# Altium PCB PCB.PcbDoc
Units mil, origin at the board's own origin, x right, y up, seen from the top; angles counter-clockwise.
Board outline 3937.01 x 2598.43 mil, 2 copper layers (Top Layer, Bottom Layer); 72 components, 55 nets, 239 pads, 52 vias.
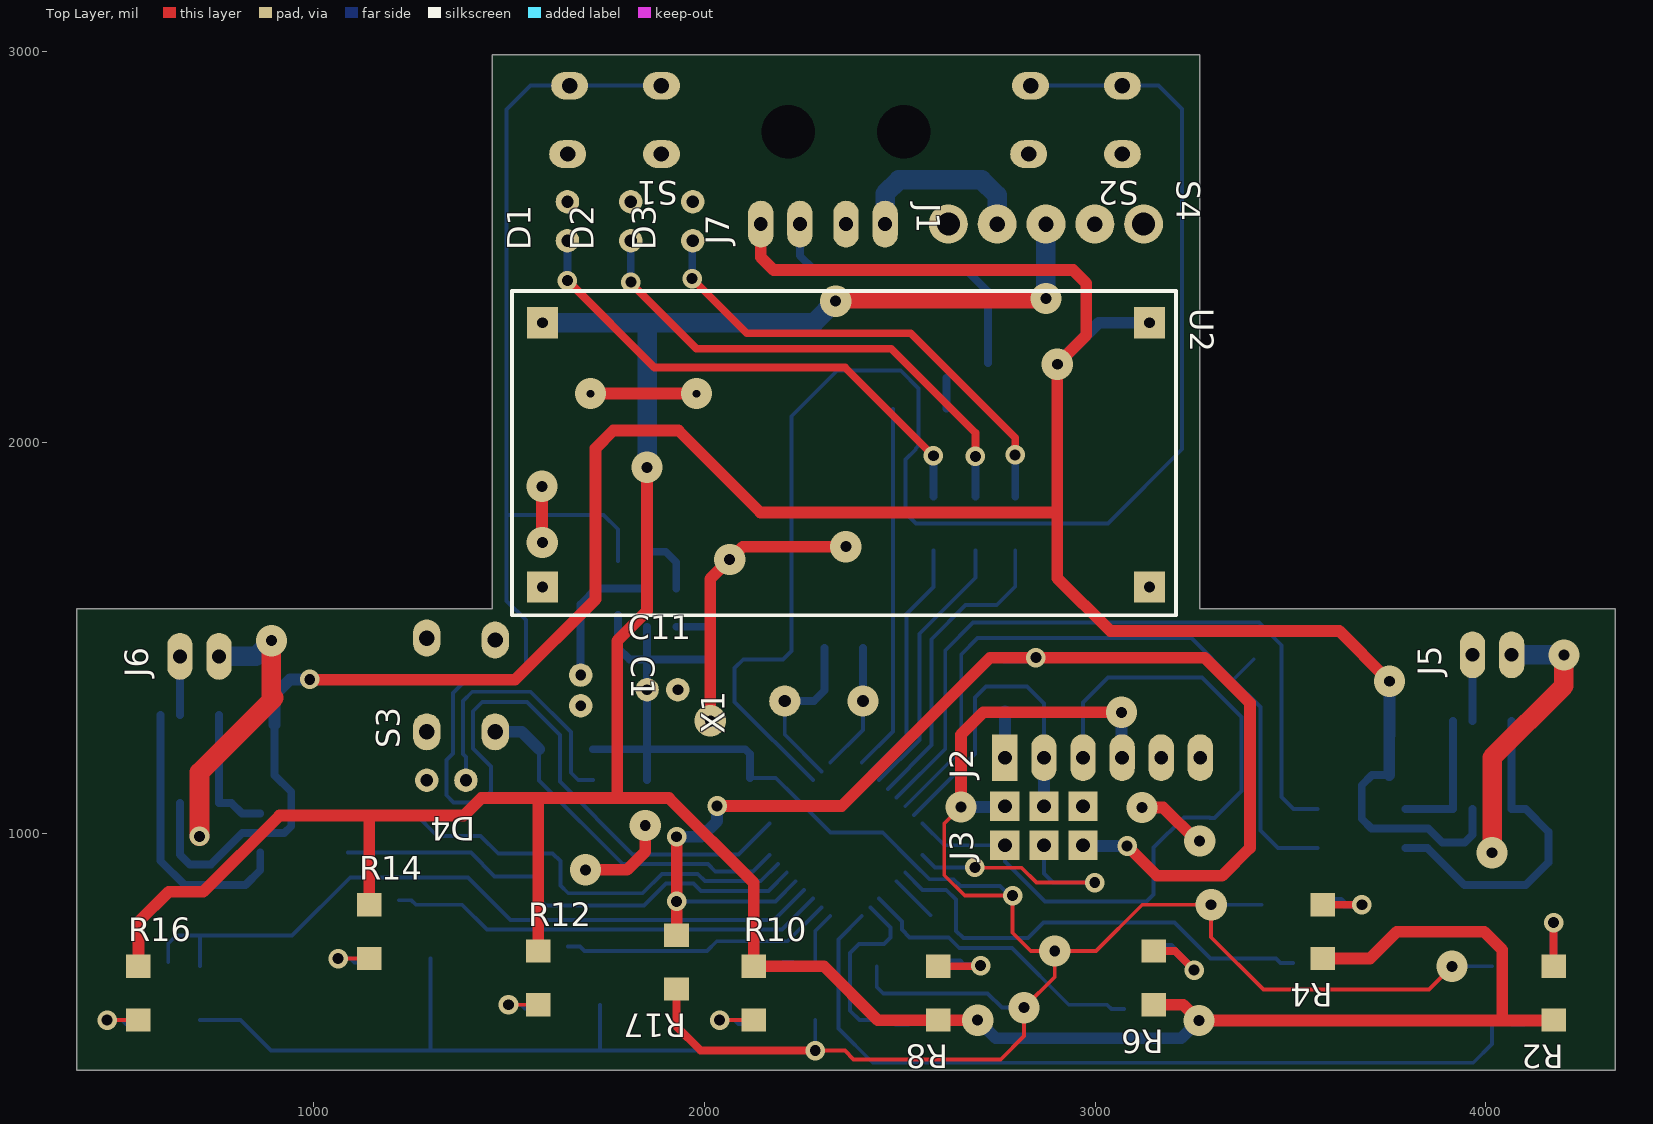
[diagram p0: Top Layer view]
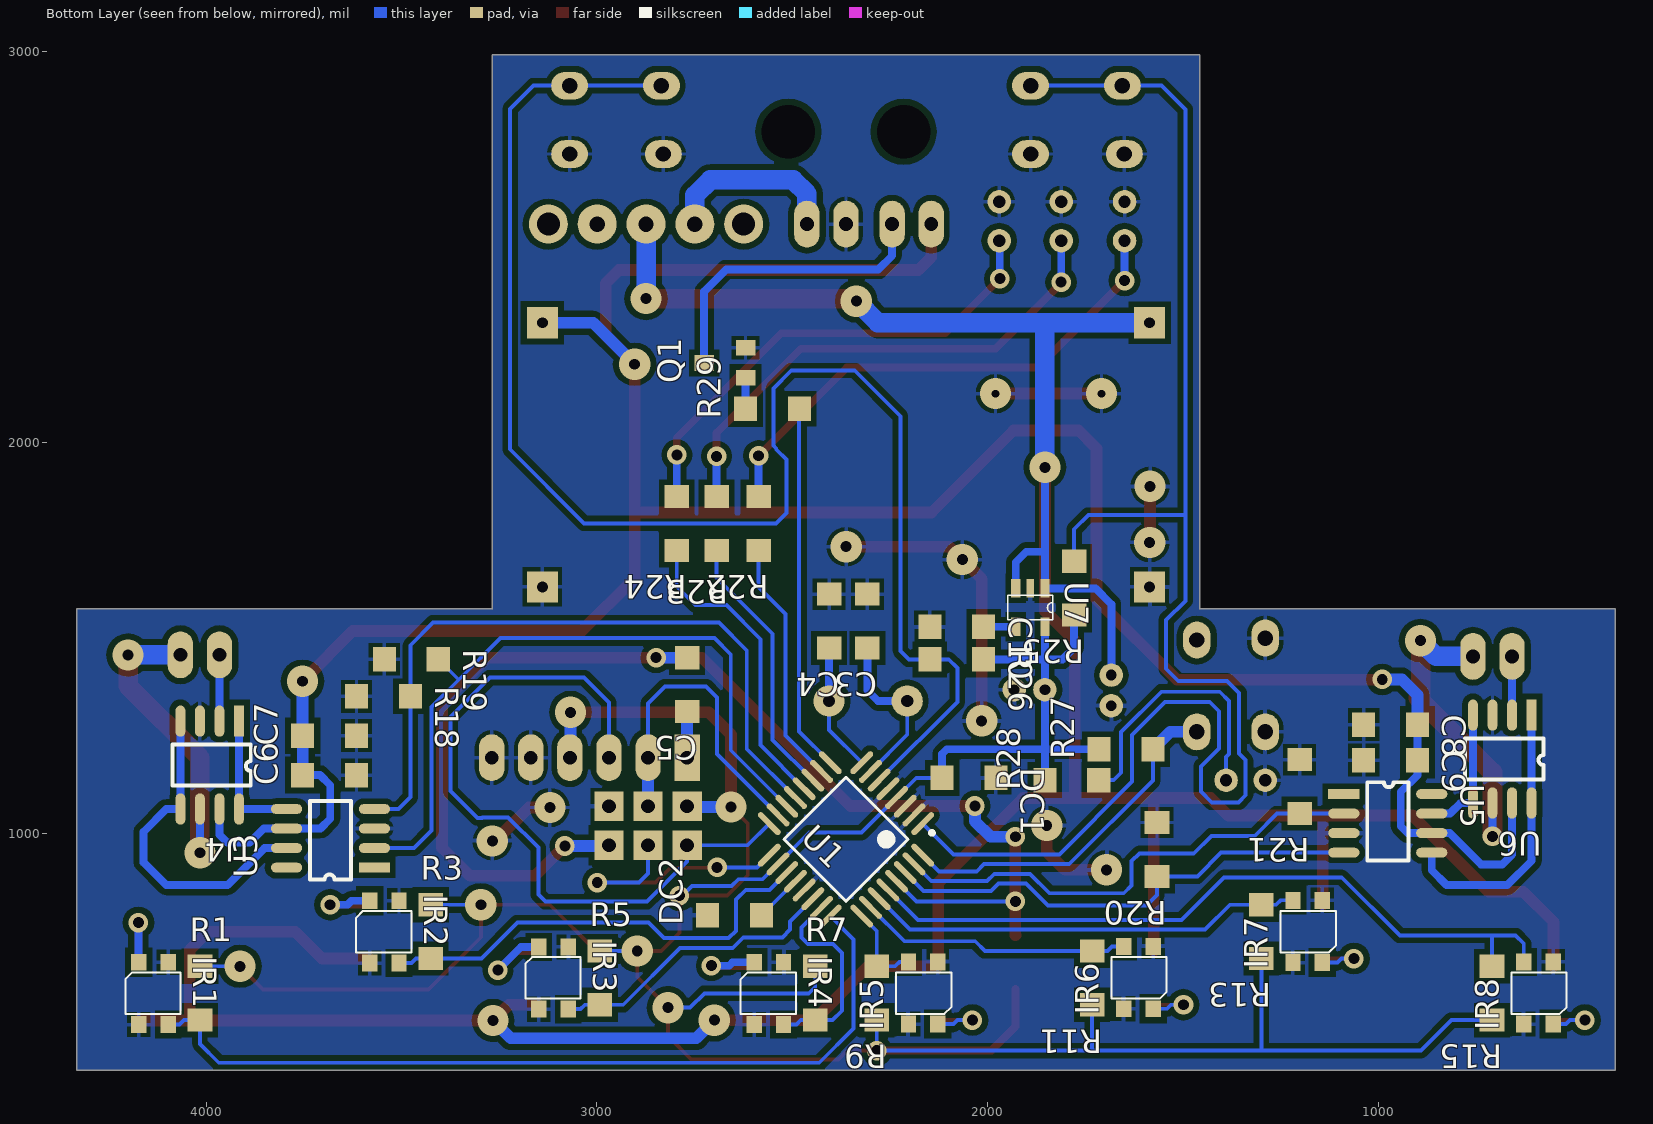
[diagram p1: Bottom Layer view, seen from below]

## Layer stack, top to bottom
Top Solder: solder mask 0.4, Solder Resist, Dk 3.5
Top Layer: signal copper 1.4
Dielectric 1: dielectric 12.6, FR-4, Dk 4.8
Bottom Layer: signal copper 1.4
Bottom Solder: solder mask 0.4, Solder Resist, Dk 3.5

## Board outline
393.7,393.7 393.7,1574.8 1456.69,1574.8 1456.69,2992.13 3267.72,2992.13 3267.72,1574.8 4330.71,1574.8 4330.71,393.7

## Design rules (kind name [scope] priority, off if disabled: settings)
Clearance [All] p1: gap=15
HoleSize [All] p1: absolutevalues=TRUE maxlimit=13779.53 minlimit=0.98 maxpercent=80.000 minpercent=20.000
PolygonConnect [All] p1: connectstyle=Relief reliefconductorwidth=10 reliefentries=4 polygonreliefangle="90 Angle" airgapwidth=10
RoutingVias [All] p1: holewidth=28 width=50 viastyle="Through Hole" minholewidth=28 minwidth=50 maxholewidth=28 maxwidth=80
SolderMaskExpansion [All] p1: expansion=4
Width [All] p1: maxlimit=50 minlimit=10 preferedwidth=20
29 further rules are at their usual default settings.

## Components (designator, comment, footprint, x,y, rotation, side; value= is the part's Value field where it differs from the comment)
C1 "CAP-ELEC" CAP-ELEC-5x11x2mm 1683.07,1365.35 r270 top
C3 "CAP-CER" C1206 2307.48,1542.91 r270 bottom
C4 "CAP-CER" C1206 2405.51,1542.91 r270 bottom
C5 "CAP-CER" C1206 2768.9,1380.32 r270 bottom
C6 "CAP-CER" C1206 3683.86,1148.82 r0 bottom
C7 "CAP-CER" C1206 3683.86,1249.62 r0 bottom
C8 "CAP-CER" C1206 968.5,1277.94 r180 bottom
C9 "CAP-CER" C1206 968.5,1187.01 r180 bottom
C10 "CAP-CER" C1206 2078.74,1528.35 r180 bottom
C11 "CAP-ELEC" CAP-ELEC-5x11x2mm 1892.52,1367.32 r0 top
D1 "LED" LED-3MM-YELLOW 1649.21,2566.54 r90 top
D2 "LED" LED-3MM-YELLOW 1811.42,2566.54 r90 top
D3 "LED" LED-3MM-YELLOW 1970.08,2566.54 r90 top
D4 "LED" LED-3MM-RED 1339.37,1135.43 r180 top
DC1 "CAP-CER" C1206 2047.24,1141.73 r180 bottom
DC2 "CAP-CER" C1206 2647.64,790.16 r0 bottom
IR1 "QRE1113GR" QRE1113GR 4133.86,590.55 r270 bottom
IR2 "QRE1113GR" QRE1113GR 3543.31,748.03 r270 bottom
IR3 "QRE1113GR" QRE1113GR 3110.24,629.92 r270 bottom
IR4 "QRE1113GR" QRE1113GR 2559.06,590.55 r270 bottom
IR5 "QRE1113GR" QRE1113GR 2165.35,590.55 r90 bottom
IR6 "QRE1113GR" QRE1113GR 1614.17,629.92 r90 bottom
IR7 "QRE1113GR" QRE1113GR 1181.1,748.03 r90 bottom
IR8 "QRE1113GR" QRE1113GR 590.55,590.55 r90 bottom
J1 "BAT" "HEADER 1x2" 2412.2,2559.06 r270 top
J2 "UART" "Header 1x6" 2768.9,1193.31 r90 top
J3 "ISP" "HEADER 2x3" 2768.9,969.16 r90 top
J5 "MOT IZQ" "HEADER 1x2" 4015.75,1456.69 r90 top
J6 "MOT DER" "HEADER 1x2" 707.48,1452.76 r90 top
J7 "EDF" "HEADER 1x2" 2194.09,2559.06 r90 top
Q1 "MMBT2222A" SOT-23 2745.3,1928.64 r90 bottom
R1 "RES" R1206 4015.75,590.55 r90 bottom
R2 "RES" R1206 4173.23,590.55 r270 top
R3 "RES" R1206 3425.2,748.03 r90 bottom
R4 "RES" R1206 3582.68,748.03 r270 top
R5 "RES" R1206 2992.13,629.92 r90 bottom
R6 "RES" R1206 3149.61,629.92 r270 top
R7 "RES" R1206 2440.94,590.55 r90 bottom
R8 "RES" R1206 2598.43,590.55 r270 top
R9 "RES" R1206 2283.46,590.55 r270 bottom
R10 "RES" R1206 2125.98,590.55 r90 top
R11 "RES" R1206 1732.28,629.92 r270 bottom
R12 "RES" R1206 1574.8,629.92 r90 top
R13 "RES" R1206 1299.21,748.03 r270 bottom
R14 "RES" R1206 1141.73,748.03 r90 top
R15 "RES" R1206 708.66,590.55 r270 bottom
R16 "RES" R1206 551.18,590.55 r90 top
R17 "RES" R1206 1928.35,670.08 r270 top
R18 "RES" R1206 3546.06,1350.39 r180 bottom
R19 "RES" R1206 3474.8,1445.28 r180 bottom
R20 "RES" R1206 1566.14,958.66 r270 bottom
R21 "RES" R1206 1201.18,1119.29 r270 bottom
R22 "RES" R1206 2585.83,1792.91 r270 bottom
R23 "RES" R1206 2693.31,1792.91 r270 bottom
R24 "RES" R1206 2795.29,1792.91 r270 bottom
R25 "RES" R1206 1778.35,1627.17 r270 bottom
R26 "RES" R1206 2078.74,1444.88 r180 bottom
R27 "RES" R1206 1645.67,1214.96 r0 bottom
R28 "RES" R1206 1784.25,1135.97 r0 bottom
R29 "RES" R1206 2550.41,2086.32 r0 bottom
S1 "BUTTON" TACT_SWITCH-SMALL-4PIN 1889.76,2913.39 r180 top
S2 "BUTTON" TACT_SWITCH-SMALL-4PIN 3069.65,2913.39 r180 top
S3 "BUTTON" TACT_SWITCH-SMALL-4PIN 1464.17,1259.45 r90 top
S4 "SLIDE-SWITCH" SWITCH 2874.02,2559.06 r0 top
U1 "ATmega328PB-AUR" 32A_M 2362.2,984.25 r315 bottom
U2 "XL6009 Module" "XL6009 MDL" 2362.2,1968.5 r0 top
U3 "4427" SOIC-8 3354.09,912.01 r0 bottom
U4 "ZXMHC3F381N8" SOIC-8 3915.75,1502.01 r270 bottom
U5 "4427" SOIC-8 1302.99,1100.39 r180 bottom
U6 "ZXMHC3F381N8" SOIC-8 607.48,1517.36 r270 bottom
U7 "LP2985" SOT-23-5 1890.55,1577.56 r270 bottom
X1 "XTAL" HC-49/S 2305.51,1338.19 r180 top

## Footprints (in the part's own frame and the unit in brackets; to place one, negate y for a bottom-side part, rotate by r counter-clockwise, add the part's x,y. Pads: shape width x height; smd on the part's side, far side on the other; paste and mask are expansions set on the pad)
32A_M [mm] "Thin QFP, 32-Leads, Body 7x7mm, Pitch 0.8mm, IPC Low Density"
  oval 1.95x0.381 smd: 1(-4.25,2.8) 2(-4.25,2) 3(-4.25,1.2) 4(-4.25,0.4) 5(-4.25,-0.4) 6(-4.25,-1.2) 7(-4.25,-2) 8(-4.25,-2.8) 17(4.25,-2.8) 18(4.25,-2) 19(4.25,-1.2) 20(4.25,-0.4) 21(4.25,0.4) 22(4.25,1.2) 23(4.25,2) 24(4.25,2.8)
  oval 0.381x1.95 smd: 9(-2.8,-4.25) 10(-2,-4.25) 11(-1.2,-4.25) 12(-0.4,-4.25) 13(0.4,-4.25) 14(1.2,-4.25) 15(2,-4.25) 16(2.8,-4.25) 25(2.8,4.25) 26(2,4.25) 27(1.2,4.25) 28(0.4,4.25) 29(-0.4,4.25) 30(-1.2,4.25) 31(-2,4.25) 32(-2.8,4.25)
  silkscreen extent -4.37,-2.85 2.85,3.77, body extent -3.5,-3.5 3.5,3.5, height 1.2
C1206 [mm]
  rect 1.5x1.6 smd: 1(-1.75,0) 2(1.75,0)
  body extent -1.6,-0.76 1.6,0.84, height 1.26
CAP-ELEC-5x11x2mm [mil]
  round 60 hole 27.56: 1(-39.37,0) 2(39.37,0)
  body extent -100,-99 99,99, height 454
HC-49/S [mil]
  round 80 hole 31.5: 1(-100,0) 2(100,0)
  body extent -223,-90 223,93, height 138
"HEADER 1x2" [mil]
  oval 120x65 hole 35.43: 1(0,50) 2(0,-50)
  body extent -49,-100 49,100, height 336
"Header 1x6" [mil]
  rect 120x65 hole 35.43: 1(0,0)
  oval 120x65 hole 35.43: 2(0,-100) 3(0,-200) 4(0,-300) 5(0,-400) 6(0,-500)
  body extent -49,-550 49,50, height 336
"HEADER 2x3" [mm]
  rect 1.905x1.905 hole 0.9: 1(0,0) 2(2.54,0) 3(0,-2.54) 4(2.54,-2.54) 5(0,-5.08) 6(2.54,-5.08)
  body extent -1.24,-6.35 3.78,1.27, height 8.54
LED-3MM-RED [mil]
  round 60 hole 31.5: A(-50,0) K(50,0)
  body extent -66,-65 64,65, height 217
LED-3MM-YELLOW [mil]
  round 60 hole 31.5: A(-50,0) K(50,0)
  body extent -66,-65 64,65, height 217
QRE1113GR [mm]
  rect 1.1x1 smd: A(-2.01,-0.97) C(2.04,0.94) E(-2.01,0.94) K(2.04,-0.97)
  silkscreen extent -1.35,-1.85 1.35,1.75, body extent -2.4,-1.8 2.4,1.8, height 1.83
R1206 [mm]
  rect 1.5x1.6 smd: 1(-1.75,0) 2(1.75,0)
  body extent -1.6,-0.76 1.6,0.84, height 0.68
SOIC-8 [mil]
  rect 80x25 smd: 1(215,0)
  oval 80x25 smd: 2(215,-50) 3(215,-100) 4(215,-150) 5(440,-150) 6(440,-100) 7(440,-50) 8(440,0)
  silkscreen extent 275,-170 380,30, body extent 212,-171 448,21, height 69
SOT-23 [mil]
  rect 40x50 smd: B(237.2,-125.98) C(275,-20) E(313.98,-125.98)
  body extent 218,-124 333,-27, height 38
SOT-23-5 [mm]
  rect 1.2x0.6 smd: 1(-1.25,0.95) 3(-1.25,-0.95) 4(1.25,-0.95) 5(1.25,0.95)
  rect 1.2x0.5 smd: 2(-1.25,0)
  silkscreen extent -0.8,-1.45 0.8,1.45, body extent -1.4,-1.45 1.4,1.45, height 1.45
SWITCH [mm]
  round 2.54 hole 1: 1(-3.175,0) 2(0,0) 3(3.175,0)
  round 2.54 hole 1.5: 4(-6.35,0) 4(6.35,0)
  body extent -7,-3.1 7,3.1, height 9.65
TACT_SWITCH-SMALL-4PIN [mm]
  oval 2.4x1.8 hole 1: 1(0,4.445) 1(6.096,4.445) 2(0,0) 2(5.969,0)
  body extent -0.94,-0.79 7.04,5.21, height 5.15
"XL6009 MDL" [mil]
  rect 80x80 hole 27.56: 0(-777,338) 1(-777,-338) 2(777,-338) 3(777,338)
  silkscreen extent -855,-411 845,419, body extent -850,-415 850,415, height 502

## Part data
J1 J5 J6 J7: library part "Header 1x2"
J2: library part "Header 1x6"
J3: library part "Header 2x3"
Q1: library part NPN
U1: "8-bit AVR Microcontroller, 32KB Flash, 1KB EEPROM, 2KB SRAM, 32-pin TQFP, Industrial Grade (-40°C to 85°C), Reel"

## Free pads (board coordinates)
  round 0 hole 137.8 unplated: 2(2214.57,2795.28) 3(2509.84,2795.28)

## Via types
v1: diameter 50, hole 28, Top Layer to Bottom Layer, 25 vias
v2: diameter 80, hole 28, Top Layer to Bottom Layer, 25 vias
v3: diameter 80, hole 19.68, Top Layer to Bottom Layer, 2 vias

## Nets (pads, with @x,y where several pads share a name; then routed paths per layer and width w, separated by ;. In a path a pad name is that pad's centre, name@x,y a point inside that pad or via, vN(x,y) a via of type N, cw(c..) or ccw(c..) an arc to the next point about the centre after c; other vN are vias at no path point)
BAT: C1.1 R2.2 R4.2 R6.2 R8.2 R10.2 R12.2 R14.2 R16.2 S4.2 U2.0 U7.1 U7.3 | length 9289.7
  Top Layer w30: R16.2 551.18,772.83 628.74,850.39 717.32,850.39 912.2,1045.28 1141.73,1045.28 ; R14.2 1141.73,1045.28 ; R12.2 1574.8,1090.08 ; v2(1853.15,1936.61) 1853.15,1568.9 1776.38,1492.13 1776.38,1090.08 ; v2(2699.21,521.65) R8.2 2443.7,521.65 2305.91,659.45 R10.2 2125.98,873.23 1909.14,1090.08 1776.38,1090.08 ; R6.2 3225.59,561.02 v2(3265.75,520.87) 4042.13,520.87 ; R4.2 3703.15,679.13 3771.65,747.64 3996.06,747.64 4042.13,701.57 4042.13,520.87 ; R2.2@4173.23,520.87 4042.13,520.87 ; 1141.73,1045.28 1384.07,1045.28 1428.87,1090.08 1574.8,1090.08 ; 1574.8,1090.08 1776.38,1090.08
  Top Layer w50: v2(2335.83,2361.81) 2342.52,2368.5 v2(2874.02,2368.5)
  Bottom Layer w20: C1.1 1683.07,1586.22 1723.62,1626.77 U7.1 1853.15,1720.47 ; v2(1853.15,1936.61) 1853.15,1720.47 ; U7.3 1927.95,1693.31 1900.79,1720.47 1853.15,1720.47
  Bottom Layer w30: v2(2699.21,521.65) 2745.67,475.2 3220.08,475.2 v2(3265.75,520.87)
  Bottom Layer w50: U2.0 1853.15,2306.5 ; v2(1853.15,1936.61) 1853.15,2306.5 ; v2(2335.83,2361.81) 2280.52,2306.5 1853.15,2306.5 ; v2(2874.02,2368.5) S4.2
BTN1: R25.1 S1.2 U1.1 | length 4125.6
  Bottom Layer w10: R25.1 1778.35,1777.95 1741.73,1814.57 1493.7,1814.57 ; S1.2@1889.76,2913.39 1654.76,2913.39 1554.72,2913.39 1493.7,2852.36 1493.7,1814.57 ; U1.1 2087.27,945.94 1816.08,945.94 1629.92,1132.1 1629.92,1251.18 1545.67,1335.43 1431.1,1335.43 1407.87,1312.2 1407.87,1216.93 1453.54,1171.26 1453.54,1106.3 1425.98,1078.74 1357.87,1078.74 1339.37,1097.24 1339.37,1187.01 1355.91,1203.54 1355.91,1359.06 1386.61,1389.76 1511.81,1389.76 1542.91,1420.87 1542.91,1545.67 1493.7,1594.88 1493.7,1814.57
BTN2: R26.1 S2.2 U1.6 | length 3939.3
  Bottom Layer w10: U1.6 2077.17,1336.1 2077.17,1422.83 2099.21,1444.88 R26.1 2201.18,1444.88 2222.83,1466.54 2222.83,2067.32 2339.76,2184.25 2502.36,2184.25 2548.03,2138.58 2548.03,1991.99 2540.83,1984.78 2540.83,1982.17 2514.96,1956.3 2514.96,1819.69 2541.73,1792.91 3032.28,1792.91 3222.05,1982.68 3222.05,2853.54 3162.2,2913.39 3069.65,2913.39 S2.2@2834.65,2913.39
BTN3: R27.1 S3.2 U1.32 | length 913.7
  Bottom Layer w10: R27.1 1576.77,1135.04 1790.87,920.94 2008.98,920.94 2027.56,902.36 2124.42,902.36 U1.32
  Bottom Layer w30: S3.2@1464.17,1259.45 1532.28,1259.45 R27.1
EDF: R29.1 U1.9 | length 938.8
  Bottom Layer w10: U1.9 2482.28,1260.23 R29.1@2482.28,2086.32
GND: C1.2 C3.1 C4.1 C6.1 C7.1 C8.1 C9.1 C10.1 C11.2 D1.K D2.K D3.K D4.K DC1.2 DC2.2 IR1.E IR1.K IR2.E IR2.K IR3.E IR3.K IR4.E IR4.K IR5.E IR5.K IR6.E IR6.K IR7.E IR7.K IR8.E IR8.K J1.2 J2.5 J2.6 J3.6 Q1.E R18.1 R19.1 R20.1 R21.1 S1.1 S2.1 S3.1 U1.2 U1.3 U1.5 U1.21 U2.1 U2.2 U3.3 U4.3 U5.3 U6.3 U7.2 | length 1581.9
  Top Layer w30: v2(1583.86,1887.8) 1583.86,1745.28 v2(1585.04,1744.09) ; v2(1695.28,906.3) 1801.97,906.3 1848.42,952.75 v2(1848.42,1020.08) ; v3(1708.27,2125.2) v3(1979.53,2125.2) ; v2(2014.96,1287.8) 2014.96,1650.79 v2(2064.57,1700.39) 2097.64,1733.46 v2(2361.81,1733.46) ; v2(3120.08,1065.75) 3174.41,1065.75 3259.84,980.32 v2(3267.32,980.32)
IR1: IR1.C R1.1 U1.24 | length 2188.3
  Bottom Layer w10: U1.24 2342.91,728.33 2342.91,500.39 2430.71,412.6 3967.72,412.6 4015.75,460.63 R1.1 4056.69,521.65 4068.11,510.24 IR1.C
IR2: IR2.C R3.1 U1.19 | length 1168.1
  Bottom Layer w10: U1.19 2558.15,855.12 2618.9,855.12 2644.09,829.92 2644.09,749.92 2662.52,731.5 2828.35,731.5 2868.11,771.26 3203.15,771.26 3295.28,679.13 R3.1 3462.99,679.13 3474.41,667.72 IR2.C
IR3: IR3.C R5.1 U1.22 | length 755.6
  Bottom Layer w10: U1.22 2505.12,774.53 2505.12,753.54 2525.2,733.46 2625.2,733.46 2652.17,706.5 2786.81,706.5 2932.28,561.02 R5.1 3030.31,561.02 3041.73,549.61 IR3.C
IR4: IR4.C R7.1 U1.23 | length 530.8
  Bottom Layer w10: U1.23 2475.98,759.12 2475.98,732.68 2459.84,716.54 2395.28,716.54 2372.44,693.7 2372.44,545.67 2396.46,521.65 R7.1 2477.95,521.65 2489.37,510.24 IR4.C
IR5: IR5.C R9.1 U1.25 | length 230.3
  Bottom Layer w10: IR5.C 2225.2,670.87 2236.61,659.45 R9.1 2283.46,749.61 U1.25
IR6: IR6.C R11.1 U1.26 | length 699.3
  Bottom Layer w10: IR6.C 1681.1,710.24 1692.52,698.82 R11.1 2006.69,698.82 2031.5,723.62 2212.93,723.62 U1.26
IR7: IR7.C R13.1 U1.27 | length 1123.2
  Bottom Layer w10: IR7.C 1250,828.35 1261.42,816.93 R13.1 1379.13,816.93 1442.91,753.15 2197.92,753.15 U1.27
IR8: IR8.C R15.1 U1.28 | length 1899.8
  Bottom Layer w10: IR8.C 627.56,717.32 648.43,738.19 708.66,738.19 ; R15.1 708.66,738.19 ; U1.28 2178.37,778.15 1503.74,778.15 1394.88,887.01 1093.31,887.01 944.49,738.19 708.66,738.19
LED1: R22.2 U1.10 | length 632.5
  Bottom Layer w10: U1.10 2516.54,1249.94 2516.54,1560.63 2585.83,1629.92 R22.2
LED2: R23.2 U1.11 | length 690
  Bottom Layer w10: U1.11 2550,1238.86 2550,1510.63 2693.31,1653.94 R23.2
LED3: R24.2 U1.12 | length 791.9
  Bottom Layer w10: U1.12 2581.1,1225.42 2581.1,1496.46 2668.5,1583.86 2748.03,1583.86 2795.29,1631.11 R24.2
MD_DIR: R20.2 U1.30 U5.4 | length 1257.4
  Bottom Layer w10: U5.4 1402.36,950.39 1462.99,889.76 R20.2 1566.14,841.73 1593.31,814.57 1844.88,814.57 1901.26,870.94 1972.36,870.94 1990.94,852.36 2163.5,852.36 U1.30
MD_PWM: R21.2 U1.31 U5.2 | length 1267.8
  Bottom Layer w10: U5.2 R21.2 1259.06,1050.39 1316.14,993.31 1427.17,993.31 1472.05,948.43 1611.42,948.43 1631.1,928.74 1631.1,866.54 1651.34,846.3 1841.26,846.3 1890.9,895.94 1982.72,895.94 2001.3,877.36 2143.96,877.36 U1.31
MI_DIR: R18.2 U1.13 U3.4 | length 1836.1
  Bottom Layer w10: U1.13 2616.14,1215.92 2616.14,1468.11 2687.4,1539.37 3418.9,1539.37 3477.17,1481.1 R18.2 3477.17,1092.52 3507.68,1062.01 U3.4
MI_PWM: R19.2 U1.14 U3.2 | length 1859
  Bottom Layer w10: U1.14 2657.09,1212.32 2657.09,1457.48 2698.82,1499.21 3246.85,1499.21 3353.35,1392.72 ; R19.2 3353.35,1392.72 ; U3.2 3467.91,962.01 3423.23,1006.69 3423.23,1322.83 3353.35,1392.72
NetC5_2: C5.2 J2.1 | length 118.1
  Bottom Layer w30: J2.1 C5.2
NetC10_2: C10.2 U7.4 | length 81.9
  Bottom Layer w20: U7.4 C10.2
NetD1_A: D1.A R22.1 | length 1347.2
  Top Layer w20: v1(1649.22,2414.56) 1872.05,2191.73 2360.24,2191.73 v1(2585.83,1966.14)
  Bottom Layer w20: v1(1649.22,2414.56) D1.A D1.A@1649.22,2535.04 ; R22.1 v1(2585.83,1966.14)
NetD2_A: D2.A R23.1 | length 1330.9
  Top Layer w20: v1@1809.45,2410.24 1979.53,2240.16 2477.95,2240.16 2693.31,2024.8 v1(2693.31,1964.57)
  Bottom Layer w20: v1(1811.42,2410.63) D2.A D2.A@1811.42,2535.04 ; R23.1 v1(2693.31,1964.57)
NetD3_A: D3.A R24.1 | length 1262
  Top Layer w20: v1(1968.5,2419.29) 2108.27,2279.53 2527.56,2279.53 2795.29,2011.8 v1(2795.29,1968.12)
  Bottom Layer w20: v1(1968.5,2419.29) 1968.5,2514.95 D3.A D3.A@1970.08,2535.04 ; R24.1 v1(2795.29,1968.12)
NetD4_A: D4.A R28.1 | length 704.6
  Bottom Layer w10: D4.A 1389.37,1194.88 1381.5,1202.76 1381.5,1338.19 1405.51,1362.2 1555.12,1362.2 1658.27,1259.06 1658.27,1154.72 1677.02,1135.97 R28.1
NetDC2_1: DC2.1 U1.20 | length 123.1
  Bottom Layer w10: U1.20 2578.57,790.16 DC2.1
NetIR1_A: IR1.A R2.1 | length 213.9
  Top Layer w20: R2.1 v1(4173.23,771.26)
  Bottom Layer w20: IR1.A 4173.23,670.87 v1(4173.23,771.26)
NetIR2_A: IR2.A R4.1 | length 205.4
  Top Layer w20: R4.1 v1(3682.68,816.93)
  Bottom Layer w20: IR2.A 3627.95,827.17 3638.19,816.93 v1(3682.68,816.93)
NetIR3_A: IR3.A R6.1 | length 253.3
  Top Layer w20: R6.1 3203.94,698.82 v1(3253.15,649.61)
  Bottom Layer w20: IR3.A 3193.7,709.06 v1(3253.15,649.61)
NetIR4_A: IR4.A R8.1 | length 234.2
  Top Layer w10: v1@2689.37,661.02 v1@2698.03,669.68
  Top Layer w20: R8.1 2705.12,659.45 v1(2706.69,661.02)
  Bottom Layer w20: IR4.A 2652.36,669.69 2661.02,661.02 v1(2706.69,661.02)
NetIR5_A: IR5.A R10.1 | length 180.2
  Top Layer w10: v1(2038.58,521.65) R10.1
  Bottom Layer w10: v1(2038.58,521.65) 2076.77,521.65 2087.01,511.42 IR5.A
NetIR6_A: IR6.A R12.1 | length 158.2
  Top Layer w10: v1(1498.43,561.02) R12.1
  Bottom Layer w10: v1(1498.43,561.02) 1530.31,561.02 1540.55,550.79 IR6.A
NetIR7_A: IR7.A R14.1 | length 164.5
  Top Layer w10: v1(1062.2,679.13) R14.1
  Bottom Layer w10: v1(1062.2,679.13) 1094.09,679.13 1104.33,668.9 IR7.A
NetIR8_A: IR8.A R16.1 | length 166.1
  Top Layer w10: v1(470.87,521.65) R16.1
  Bottom Layer w10: v1(470.87,521.65) 508.66,521.65 518.9,511.42 IR8.A
NetJ1_1: J1.1 S4.1 | length 469.6
  Bottom Layer w50: J1.1 2462.2,2637.01 2497.64,2672.44 2709.45,2672.44 2749.02,2632.87 S4.1
NetJ5_1: J5.1 U4.2 | length 169.7
  Bottom Layer w20: U4.2 J5.1
NetJ5_2: J5.2 U4.6 | length 828.5
  Top Layer w50: v2(4015.75,950) 4015.75,1193.31 4199.61,1377.17 v2(4199.61,1456.3)
  Bottom Layer w20: v2(4015.75,950) U4.6
  Bottom Layer w50: J5.2 4066.14,1456.3 v2(4199.61,1456.3)
NetJ6_1: J6.1 U6.2 | length 150.4
  Bottom Layer w20: U6.2 J6.1
NetJ6_2: J6.2 U6.6 | length 819.2
  Top Layer w50: v1(707.48,991.73) 707.48,1155.91 898.03,1346.46 891.73,1352.76 v2(891.73,1492.91)
  Bottom Layer w20: v1(707.48,991.73) U6.6
  Bottom Layer w50: J6.2 851.57,1452.76 v2(891.73,1492.91)
NetJ7_2: J7.2 Q1.C | length 782.8
  Bottom Layer w20: J7.2 2244.09,2478.35 2279.53,2442.91 2668.9,2442.91 2725.3,2386.52 Q1.C
NetQ1_B: Q1.B R29.2 | length 79.5
  Bottom Layer w20: R29.2 Q1.B
NetU3_5: U3.5 U4.1 U4.8 | length 346.7
  Bottom Layer w20: U3.5 U4.8 U4.1
NetU3_7: U3.7 U4.4 U4.5 | length 850.8
  Bottom Layer w20: U3.7 3850.2,962.01 3944.88,867.32 4101.97,867.32 4159.84,925.2 4159.84,1003.94 4101.77,1062.01 U4.5 U4.4
NetU5_5: U5.5 U6.1 U6.8 | length 715
  Bottom Layer w20: U6.1 U6.8 607.48,929.53 669.68,867.32 825.2,867.32 862.99,905.12 U5.5
NetU5_7: U5.7 U6.4 U6.5 | length 341.7
  Bottom Layer w20: U6.4 U6.5 789.17,1077.36 816.14,1050.39 U5.7
RST: C5.1 J3.5 R17.1 U1.29 | length 3245.3
  Top Layer w30: R17.1 1928.74,739.37 v1(1928.74,825.59) v1(1928.74,990.94) ; v1(2032.28,1069.68) 2351.18,1069.68 2730.71,1449.21 v1(2848.43,1449.21) 3280.71,1449.21 3396.06,1333.86 3396.06,962.2 3324.8,890.94 3158.27,890.94 v1(3081.89,967.32)
  Bottom Layer w10: v1(1928.74,825.59) 2181.27,825.59 U1.29 ; J3.5 J3.5@2970.74,967.32
  Bottom Layer w30: v1(1928.74,990.94) 1992.13,990.94 2032.28,1031.1 v1(2032.28,1069.68) ; C5.1 v1(2848.43,1449.21) ; J3.5@2970.74,967.32 v1(3081.89,967.32)
RXD1: J2.3 J3.1 U1.16 | length 1916.1
  Bottom Layer w10: U1.16 2613.93,969.16 J3.1 2768.9,927.95 2872.05,824.8 3131.5,824.8 3149.61,842.91 3149.61,962.99 3226.93,1040.32 3292.18,1040.32 3293.51,1038.98 3305.51,1038.98 3374.41,1107.87 3374.41,1297.64 3273.62,1398.43 3033.07,1398.43 2968.9,1334.25 J2.3
SCK0: J3.3 U1.17 | length 681.5
  Top Layer w10: v1(2692.13,912.6) 2693.06,911.66 2811.57,911.66 2849.61,873.62 v1(2998.82,873.62)
  Bottom Layer w10: U1.17 2589.76,912.6 v1(2692.13,912.6) ; J3.3 2868.9,896.46 2891.73,873.62 v1(2998.82,873.62)
TXD1: J2.2 J3.4 U1.15 | length 834.1
  Bottom Layer w10: U1.15 2692.52,1203.21 2692.52,1347.24 2720.87,1375.59 2825.2,1375.59 2868.9,1331.89 J2.2
  Bottom Layer w30: J3.4 J2.2
VCC: C11.1 DC1.1 J2.4 J3.2 R1.2 R3.2 R5.2 R7.2 R9.2 R11.2 R13.2 R15.2 R17.2 R25.2 R26.2 R27.2 R28.2 U1.4 U1.18 U7.5 | length 8808.2
  Top Layer w10: v1(2283.46,443.7) 2359.45,443.7 2381.89,421.26 2758.27,421.26 2817.72,480.71 v2(2817.72,553.54) 2896.46,632.28 v2(2896.46,698.82) ; v2(2656.3,1066.93) 2613.78,1024.41 2613.78,892.52 2666.14,840.16 v1(2788.58,840.16) 2788.58,745.28 2835.04,698.82 v2(2896.46,698.82) ; v2(3913.39,659.45) 3854.33,600.39 3430.32,600.39 3296.85,733.86 v2(3296.85,816.93) 3120.47,816.93 3002.36,698.82 v2(2896.46,698.82)
  Top Layer w20: R17.2 1928.35,505.51 1990.16,443.7 v1(2283.46,443.7)
  Top Layer w30: v2(2656.3,1066.93) 2656.3,1251.97 2713.78,1309.45 v2(3067.32,1309.45)
  Bottom Layer w10: R15.2 812.2,521.65 890.16,443.7 1299.21,443.7 ; R13.2 1299.21,443.7 ; R11.2 1732.28,443.7 ; DC1.1 2182.45,1141.73 U1.4 2322.61,1001.57 2456.24,1001.57 U1.18 2575.53,882.28 2637.4,882.28 2655.12,864.57 2755.91,864.57 v1@2788.58,831.89 ; R9.2 v1(2283.46,443.7) 1732.28,443.7 ; R7.2 2440.94,606.69 2457.48,590.16 2724.41,590.16 2761.02,553.54 v2(2817.72,553.54) ; v1(2788.58,840.16) v1@2788.58,831.89 ; v2(2896.46,698.82) R5.2 ; J2.4@3068.11,1194.09 J2.4 ; v2(3296.85,816.93) R3.2 ; v2(3913.39,659.45) R1.2 ; 1299.21,443.7 1732.28,443.7 ; v1@2788.58,831.89 v1@2789.37,831.1 ; v1@2789.37,831.1 2789.37,830.31 2791.34,828.35 2791.73,828.74 v1@2789.37,831.1
  Bottom Layer w20: R27.2 1853.15,1214.96 ; R25.2 1778.35,1474.8 1808.27,1444.88 1853.15,1444.88 ; R28.2 1853.15,1214.96 ; U7.5 1853.15,1451.18 ; R26.2 1859.45,1444.88 1853.15,1451.18 ; DC1.1 2116.14,1203.15 2104.33,1214.96 1853.15,1214.96 ; 1853.15,1214.96 1853.15,1444.88 ; 1853.15,1444.88 1853.15,1451.18
  Bottom Layer w30: v2(2656.3,1066.93) 2766.67,1066.93 J3.2 ; v2(3067.32,1309.45) 3067.32,1194.88 J2.4@3068.11,1194.09
VHI: C6.2 C7.2 C8.2 C9.2 J7.1 U2.3 U3.6 U4.7 U5.6 U6.7 | length 7192.9
  Top Layer w30: v1(989.76,1393.7) 990.94,1392.52 1514.96,1392.52 1721.26,1598.82 1721.26,1985.43 1766.54,2030.71 1933.46,2030.71 2143.31,1820.87 2903.15,1820.87 ; J7.1 2144.09,2474.41 2177.17,2441.34 2943.7,2441.34 2977.17,2407.87 2977.17,2274.41 v2(2903.15,2200.39) 2903.15,1820.87 ; v2(3753.15,1388.98) 3740.16,1388.98 3746.65,1395.47 3624.41,1517.72 3038.19,1517.72 2903.15,1652.76 2903.15,1820.87
  Bottom Layer w20: U6.7 657.48,945.28 682.68,920.08 736.61,920.08 816.93,1000.39 U5.6 924.41,1000.39 942.13,1018.11 942.13,1105.91 899.61,1148.43 C9.2 C8.2 ; C6.2 3708.66,1148.82 3682.28,1122.44 3682.28,1037.01 3707.28,1012.01 U3.6 3852.56,1012.01 3888.19,976.38 3946.06,976.38 3965.75,996.06 U4.7
  Bottom Layer w30: C8.2 899.61,1353.94 939.37,1393.7 v1(989.76,1393.7) ; v2(2903.15,2200.39) 3009.26,2306.5 U2.3 ; C6.2 C7.2 3752.36,1250.01 3753.15,1250.8 v2(3753.15,1388.98)
XTAL1: C3.2 U1.7 X1.2 | length 440.6
  Bottom Layer w10: X1.2 2205.51,1252.3 U1.7
  Bottom Layer w20: X1.2 2279.92,1338.19 2307.48,1365.75 C3.2
XTAL2: C4.2 U1.8 X1.1 | length 328.2
  Bottom Layer w10: U1.8 2405.51,1264.19 X1.1
  Bottom Layer w20: X1.1 C4.2
pads on no net: S4.3 S4.4 U3.1 U3.8 U5.1 U5.8

## Polygon pours and split planes (outlines as drawn)
GND on Bottom Layer "B-GND" (solid, remove dead copper, pour order 0): 393.7,1574.8 393.7,393.7 4330.71,393.7 4330.71,1574.8 3267.72,1574.8 3267.72,2992.13 1456.69,2992.13 1456.69,1574.8 393.7,1574.8

## Silkscreen, mask and mechanical layers (free items; w line width, h text height)
Mechanical 1:
  lines w10: 393.7,1574.8 393.7,393.7 4330.71,393.7 4330.71,1574.8
Mechanical 13:
  lines w10: 393.7,1574.8 1456.69,1574.8 1456.69,2992.13 3267.72,2992.13 3267.72,1574.8 4330.71,1574.8
Mechanical 15:
  lines w10: 393.7,984.25 4330.71,984.25 ; 984.25,393.7 984.25,1574.8 ; 984.25,590.55 3740.16,590.55 ; 984.25,1181.1 3740.16,1181.1 ; 1176.97,731.37 ccw(c2362.2,5511.23) 3547.44,731.37 ; 1181.1,1181.1 ccw(c2362.2,2066.93) 3543.31,1181.1 ; 1456.69,1574.8 3267.72,1574.8 ; 1968.5,393.7 1968.5,2992.13 ; 2214.57,2795.28 2362.2,2795.28 2509.84,2795.28 ; 2362.2,393.7 2362.2,2992.13 ; 2755.91,393.7 2755.91,2992.13 ; 3740.16,393.7 3740.16,1574.8